# Altium PCB Converter.PcbDoc
Units mil, origin at the board's own origin, x right, y up, seen from the top; angles counter-clockwise.
Board outline 880 x 1030 mil, 2 copper layers (Top1, Bottom2), stack 36.422 mil thick; 2 components, 26 nets, 84 pads, 10 vias.
Unrouted connection lines stored in the file: 98.
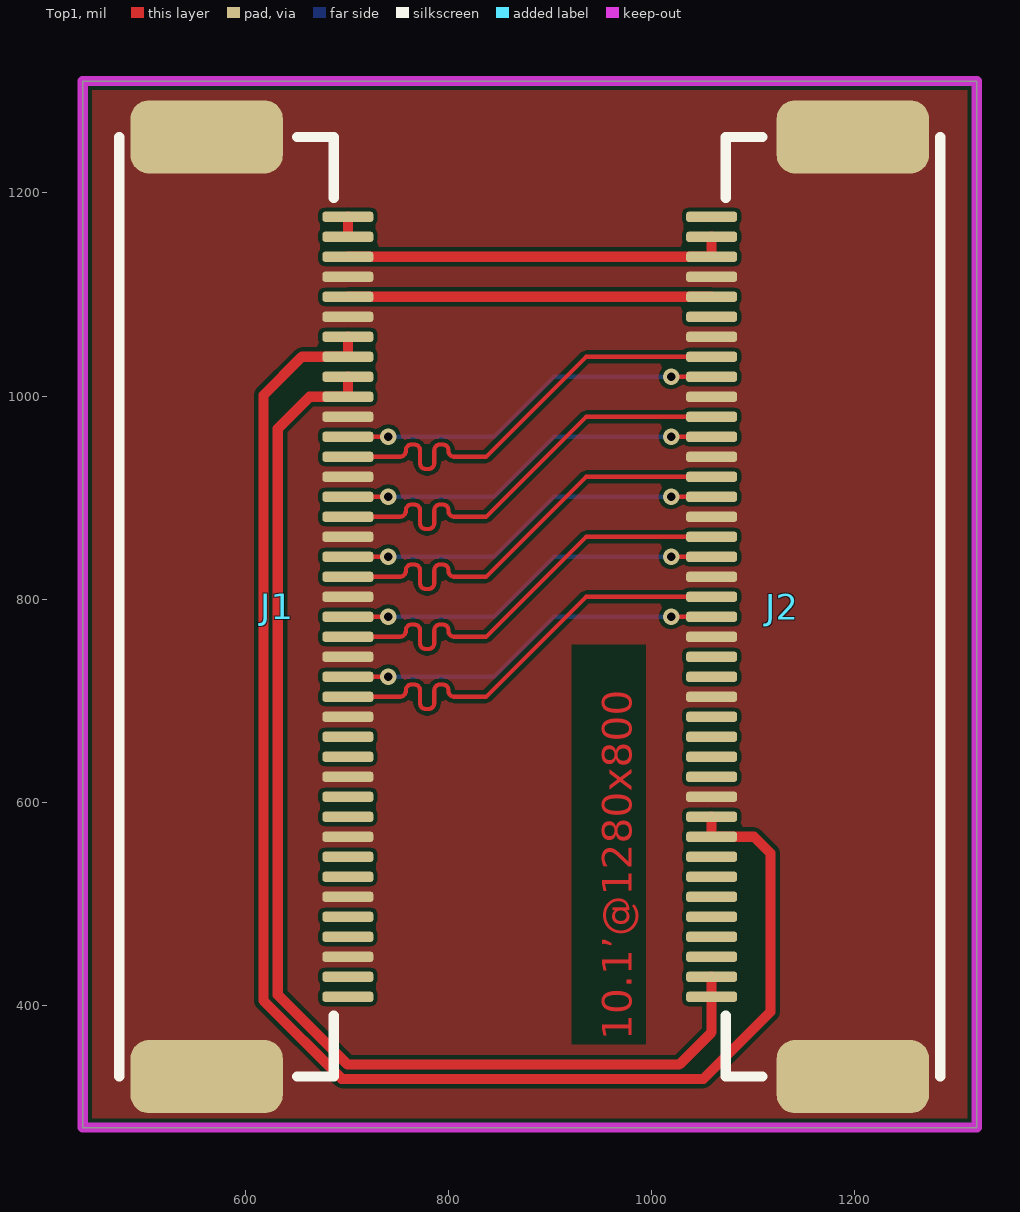
[diagram p0: Top1 view]
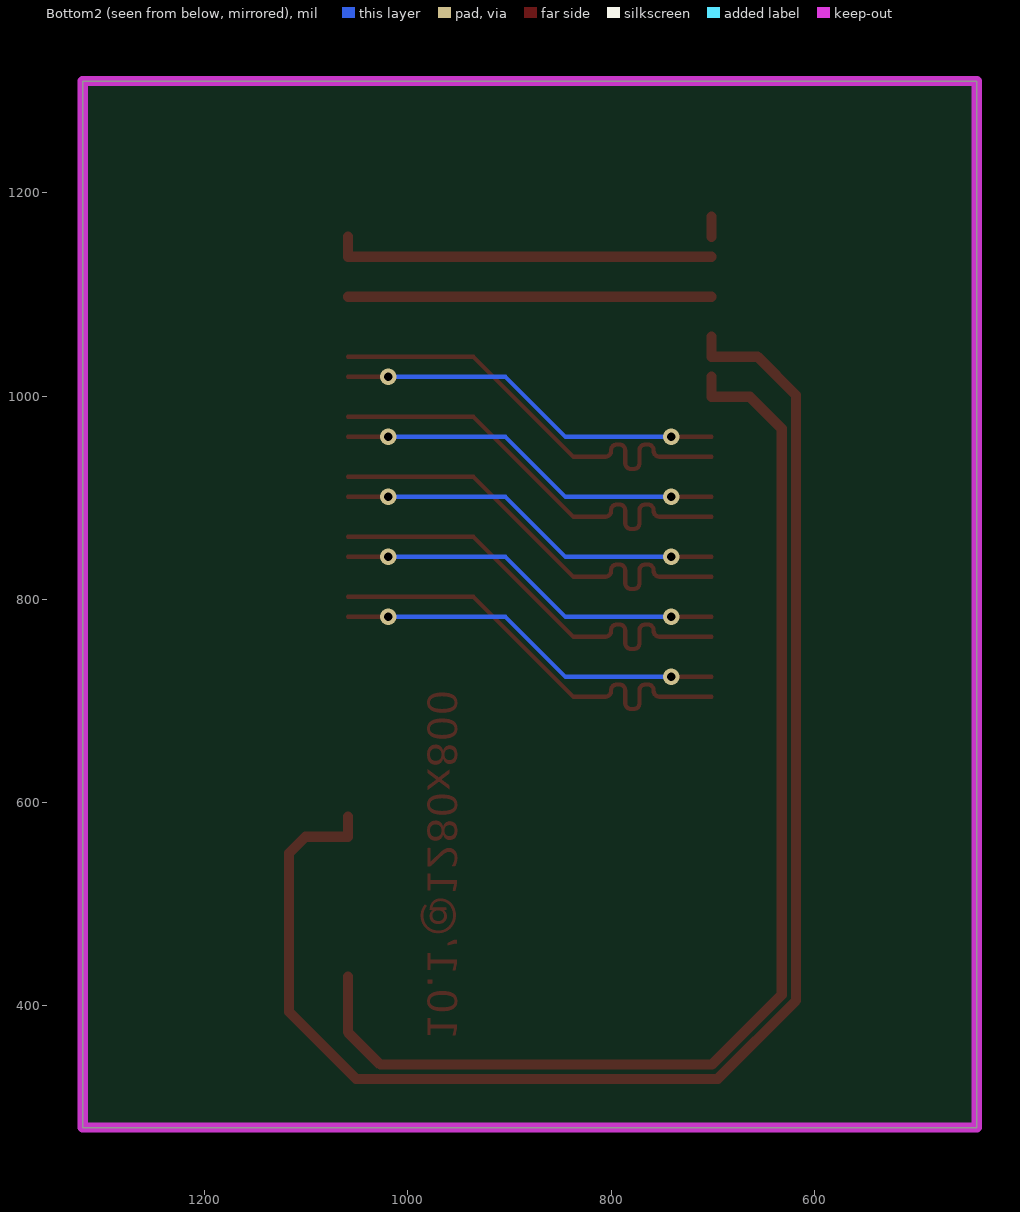
[diagram p1: Bottom2 view, seen from below]

## Layer stack, top to bottom
Top Solder: solder mask 0.4, Solder Resist, Dk 3.5
Top1: signal copper 1.4
Dielectric1: core 33.622, FR-4, Dk 4.2
Bottom2: signal copper 1.4
Bottom Solder: solder mask 0.4, Solder Resist, Dk 3.5

## Board outline
440,280 1320,280 1320,1310 440,1310

## Design rules (kind name [scope] priority, off if disabled: settings)
Clearance [All] p1: gap=4 ignorepadtopadclearanceinfootprint=FALSE except(0: Arc-Hole Track-Hole SMDPad-Hole THPad-Hole Via-Hole Fill-Hole Poly-Hole Region-Hole Text-Hole)
ComponentClearance [All] p1: gap=0 collisioncheckmode=3 verticalgap=0 showdistances=FALSE
DiffPairsRouting [All] p1: maxlimit=9 minlimit=4 mostfreqgap=4 toplayer_minwidth=4 toplayer_maxwidth=15 toplayer_prefwidth=4 bottomlayer_minwidth=4 bottomlayer_maxwidth=15 bottomlayer_prefwidth=4 maxuncoupledlength=500
FanoutControl Fanout_BGA [All] p1: bgadir=Out bgaviamode=Centered fanoutstyle=Auto fanoutdirection=Alternating viagrid=1 // Fanout_BGA (Default Rule)
HoleSize [All] p1: absolutevalues=TRUE maxlimit=10000 minlimit=8 maxpercent=80.000 minpercent=20.000
MinimumSolderMaskSliver [All] p1 off: minsoldermaskwidth=2
PlaneClearance [All] p1: clearance=8
PlaneConnect [All] p1: planeconnectstyle=Direct reliefexpansion=20 reliefentries=4 reliefconductorwidth=10 reliefairgap=10
PolygonConnect [All] p1: connectstyle=Direct reliefconductorwidth=10 reliefentries=4 polygonreliefangle="90 Angle" airgapwidth=10
RoutingVias [All] p1: holewidth=8 width=16 viastyle="Through Hole" minholewidth=6 minwidth=12 maxholewidth=28 maxwidth=50
SilkToSilkClearance [All] p1: silktosilkclearance=0
SilkToSolderMaskClearance [IsPad] p1: minsilkscreentomaskgap=0 clearancetoexposedcopper=TRUE
SolderMaskExpansion [All] p1: expansion=3
Width GND [(InNet('AGND') OR InNet('GND'))] p1: maxlimit=50 minlimit=4 preferedwidth=10
Width VCC [(InNet('VDD_SYS_3.3V') OR InNet('VDD_AV_3.3V') OR InNet('VDD_5V') OR InNet('VDD1V2-SYS') OR InNet('VDD1V1-EPHY') OR InNet('VDD-CPUX') OR InNet('NetC15_2') OR InNet('NetC9_2') OR InNet('NetC12_2'))] p2: maxlimit=50 minlimit=4 preferedwidth=10
Width [All] p3: maxlimit=10000 minlimit=4 preferedwidth=4
21 further rules are at their usual default settings.

## Classes and differential pairs
net class MIPI: MIPI1_D0N MIPI1_D0P MIPI1_D1N MIPI1_D1P MIPI1_D2N MIPI1_D2P MIPI1_D3N MIPI1_D3P MIPI1_DCN MIPI1_DCP

## Components (designator, comment, footprint, x,y, rotation, side; value= is the part's Value field where it differs from the comment)
J1 "0.5S_A_40PWB" FFC_0.5_40 641,792.64 r270 top
J2 "0.5S_A_40PWB" FFC_0.5_40 1119,792.64 r90 top

## Footprints (in the part's own frame and the unit in brackets; to place one, negate y for a bottom-side part, rotate by r counter-clockwise, add the part's x,y. Pads: shape width x height; smd on the part's side, far side on the other; paste and mask are expansions set on the pad)
FFC_0.5_40 [mil]
  rrect50% 72x150 smd: 0(-462.48,-78.98) 0(462.48,-78.98)
  rrect50% 10x50 smd: 1(-383.86,60) 2(-364.17,60) 3(-344.49,60) 4(-324.8,60) 5(-305.12,60) 6(-285.43,60) 7(-265.75,60) 8(-246.06,60) 9(-226.38,60) 10(-206.69,60) 11(-187.01,60) 12(-167.32,60) 13(-147.64,60) 14(-127.95,60) 15(-108.27,60) 16(-88.58,60) 17(-68.9,60) 18(-49.21,60) 19(-29.53,60) 20(-9.84,60) 21(9.84,60) 22(29.53,60) 23(49.21,60) 24(68.9,60) 25(88.58,60) 26(108.27,60) 27(127.95,60) 28(147.64,60) 29(167.32,60) 30(187.01,60) 31(206.69,60) 32(226.38,60) 33(246.06,60) 34(265.75,60) 35(285.43,60) 36(305.12,60) 37(324.8,60) 38(344.49,60) 39(364.17,60) 40(383.86,60)
  silkscreen extent -462,-165 462,46, body extent -490,-205 490,78, height 99

## Part data
J1 J2: library part FPC40-0.5mm, "Header, 40-Pin", LatestRevisionDate=17-Jul-2002, LatestRevisionNote="Re-released for DXP Platform.", Publisher="Altium Limited"

## Via types
v1: diameter 16, hole 8, Top1 to Bottom2, tented both sides, 10 vias

## Nets (pads, with @x,y where several pads share a name; then routed paths per layer and width w, separated by ;. In a path a pad name is that pad's centre, name@x,y a point inside that pad or via, vN(x,y) a via of type N, cw(c..) or ccw(c..) an arc to the next point about the centre after c; other vN are vias at no path point)
GND: J1.0 J1.4 J1.6 J1.11 J1.14 J1.17 J1.20 J1.23 J1.26 J1.29 J1.32 J1.35 J1.38 J2.0 J2.11 J2.16 J2.19 J2.22 J2.25 J2.28 J2.31 J2.34 J2.37
MIPI0_D0N: J1.28
MIPI0_D0P: J1.27
MIPI0_D1N: J1.31
MIPI0_D1P: J1.30
MIPI0_D2N: J1.37
MIPI0_D2P: J1.36
MIPI0_D3N: J1.40
MIPI0_D3P: J1.39
MIPI0_DCN: J1.34
MIPI0_DCP: J1.33
MIPI1_D0N: J1.13 J2.33 | length 451.5
  Top1 w4: J1.13 751,940.28 752.4,940.28 ccw(c752.4,945.88) 758,945.88 758,946.68 cw(c763.6,946.68) 763.6,952.28 766.4,952.28 cw(c766.4,946.68) 772,946.68 772,940.28 772,933.88 ccw(c777.6,933.88) 777.6,928.27 780.4,928.28 ccw(c780.4,933.88) 786,933.88 786,940.28 786,946.68 cw(c791.6,946.68) 791.6,952.28 794.4,952.28 cw(c794.4,946.68) 800,946.68 800,945.88 ccw(c805.6,945.88) 805.6,940.27 808,940.28 837.06,940.28 935.48,1038.7 J2.33
MIPI1_D0P: J1.12 J2.32 | length 382.5
  Top1 w4: J1.12 v1(740.74,959.96) ; v1(1019.26,1019.02) J2.32
  Bottom2 w4: v1(740.74,959.96) 844.74,959.96 903.8,1019.02 v1(1019.26,1019.02)
MIPI1_D1N: J1.16 J2.30 | length 451.5
  Top1 w4: J1.16 751,881.22 752.4,881.22 ccw(c752.4,886.82) 758,886.82 758,887.62 cw(c763.6,887.62) 763.6,893.22 766.4,893.22 cw(c766.4,887.62) 772,887.62 772,881.22 772,874.82 ccw(c777.6,874.82) 777.6,869.22 780.4,869.22 ccw(c780.4,874.82) 786,874.82 786,881.22 786,887.62 cw(c791.6,887.62) 791.6,893.22 794.4,893.22 cw(c794.4,887.62) 800,887.62 800,886.82 ccw(c805.6,886.82) 805.6,881.22 808,881.22 837.06,881.22 935.48,979.65 J2.30
MIPI1_D1P: J1.15 J2.29 | length 382.5
  Top1 w4: J1.15 v1(740.74,900.9) ; v1(1019.26,959.96) J2.29
  Bottom2 w4: v1(740.74,900.9) 844.74,900.9 903.8,959.96 v1(1019.26,959.96)
MIPI1_D2N: J1.22 J2.24 | length 451.5
  Top1 w4: J1.22 751,763.11 752.4,763.11 ccw(c752.4,768.71) 758,768.71 758,769.51 cw(c763.6,769.51) 763.6,775.11 766.4,775.11 cw(c766.4,769.51) 772,769.51 772,763.11 772,756.71 ccw(c777.6,756.71) 777.6,751.11 780.4,751.11 ccw(c780.4,756.71) 786,756.71 786,763.11 786,769.51 cw(c791.6,769.51) 791.6,775.11 794.4,775.11 cw(c794.4,769.51) 800,769.51 800,768.71 ccw(c805.6,768.71) 805.6,763.11 808,763.11 837.06,763.11 935.48,861.54 J2.24
MIPI1_D2P: J1.21 J2.23 | length 382.5
  Top1 w4: J1.21 v1(740.74,782.8) ; v1(1019.26,841.85) J2.23
  Bottom2 w4: v1(740.74,782.8) 844.74,782.8 903.8,841.85 v1(1019.26,841.85)
MIPI1_D3N: J1.25 J2.21 | length 451.5
  Top1 w4: J1.25 751,704.06 752.4,704.06 ccw(c752.4,709.65) 758,709.65 758,710.45 cw(c763.6,710.45) 763.6,716.06 766.4,716.06 cw(c766.4,710.45) 772,710.45 772,704.06 772,697.65 ccw(c777.6,697.65) 777.6,692.05 780.4,692.06 ccw(c780.4,697.65) 786,697.65 786,704.06 786,710.45 cw(c791.6,710.45) 791.6,716.06 794.4,716.06 cw(c794.4,710.45) 800,710.45 800,709.65 ccw(c805.6,709.65) 805.6,704.05 808,704.06 837.06,704.06 935.48,802.48 J2.21
MIPI1_D3P: J1.24 J2.20 | length 382.5
  Top1 w4: J1.24 v1(740.74,723.74) ; v1(1019.26,782.8) J2.20
  Bottom2 w4: v1(740.74,723.74) 844.74,723.74 903.8,782.8 v1(1019.26,782.8)
MIPI1_DCN: J1.19 J2.27 | length 451.5
  Top1 w4: J1.19 751,822.16 752.4,822.16 ccw(c752.4,827.77) 758,827.77 758,828.57 cw(c763.6,828.57) 763.6,834.17 766.4,834.16 cw(c766.4,828.57) 772,828.57 772,822.16 772,815.77 ccw(c777.6,815.77) 777.6,810.16 780.4,810.16 ccw(c780.4,815.77) 786,815.77 786,822.16 786,828.57 cw(c791.6,828.57) 791.6,834.17 794.4,834.16 cw(c794.4,828.57) 800,828.57 800,827.77 ccw(c805.6,827.77) 805.6,822.16 808,822.16 837.06,822.16 935.48,920.59 J2.27
MIPI1_DCP: J1.18 J2.26 | length 382.5
  Top1 w4: J1.18 v1(740.74,841.85) ; v1(1019.26,900.91) J2.26
  Bottom2 w4: v1(740.74,841.85) 844.74,841.85 903.8,900.91 v1(1019.26,900.91)
RST: J1.5 J2.36 | length 358
  Top1 w10: J1.5 J2.36
VCC_3V3: J1.3 J2.38 J2.39 | length 377.7
  Top1 w10: J1.3 J2.38 J2.39
VCC_5V: J1.1 J1.2 | length 19.7
  Top1 w10: J1.2 J1.1
VLED+: J1.9 J1.10 J2.1 J2.2 | length 1182.1
  Top1 w10: J1.9 J1.10 663.33,999.33 632,968 632,410.8 700.8,342 1027,342 1059,374 J2.1 J2.2
VLED-: J1.7 J1.8 J2.9 J2.10 | length 1513
  Top1 w10: J1.7 J1.8 655.7,1038.7 618,1001 618,405 695,328 1051,328 1117,394 1117,550 1100.74,566.26 J2.9 J2.10
pads on no net: J2.3 J2.4 J2.5 J2.6 J2.7 J2.8 J2.12 J2.13 J2.14 J2.15 J2.17 J2.18 J2.35 J2.40

## Polygon pours and split planes (outlines as drawn)
GND on Top1 (solid, remove dead copper, pour order 0): 440,1310 1320,1310 1320,280 440,280

## Keep-outs
Keep-Out Layer:
  the board outline again, w10

## Other copper
Top1:
  text "10.1’@1280x800" at 990,366 h50 r90

## Silkscreen, mask and mechanical layers (free items; w line width, h text height)
Top Solder:
  rectangle: 921.21,362 994,755.13